# Altium PCB EVB_MBD_AK376xE_V1.0.0.PcbDoc (part 3 of 5)
Units mil, origin at the board's own origin, x right, y up, seen from the top; angles counter-clockwise.
Board outline 7060.01 x 5460.01 mil, 4 copper layers (Top, Layer 1, Layer 2, Bottom), stack 5.512 mil thick; 344 components, 305 nets, 1421 pads, 1325 vias.
Unrouted connection lines stored in the file: 947.
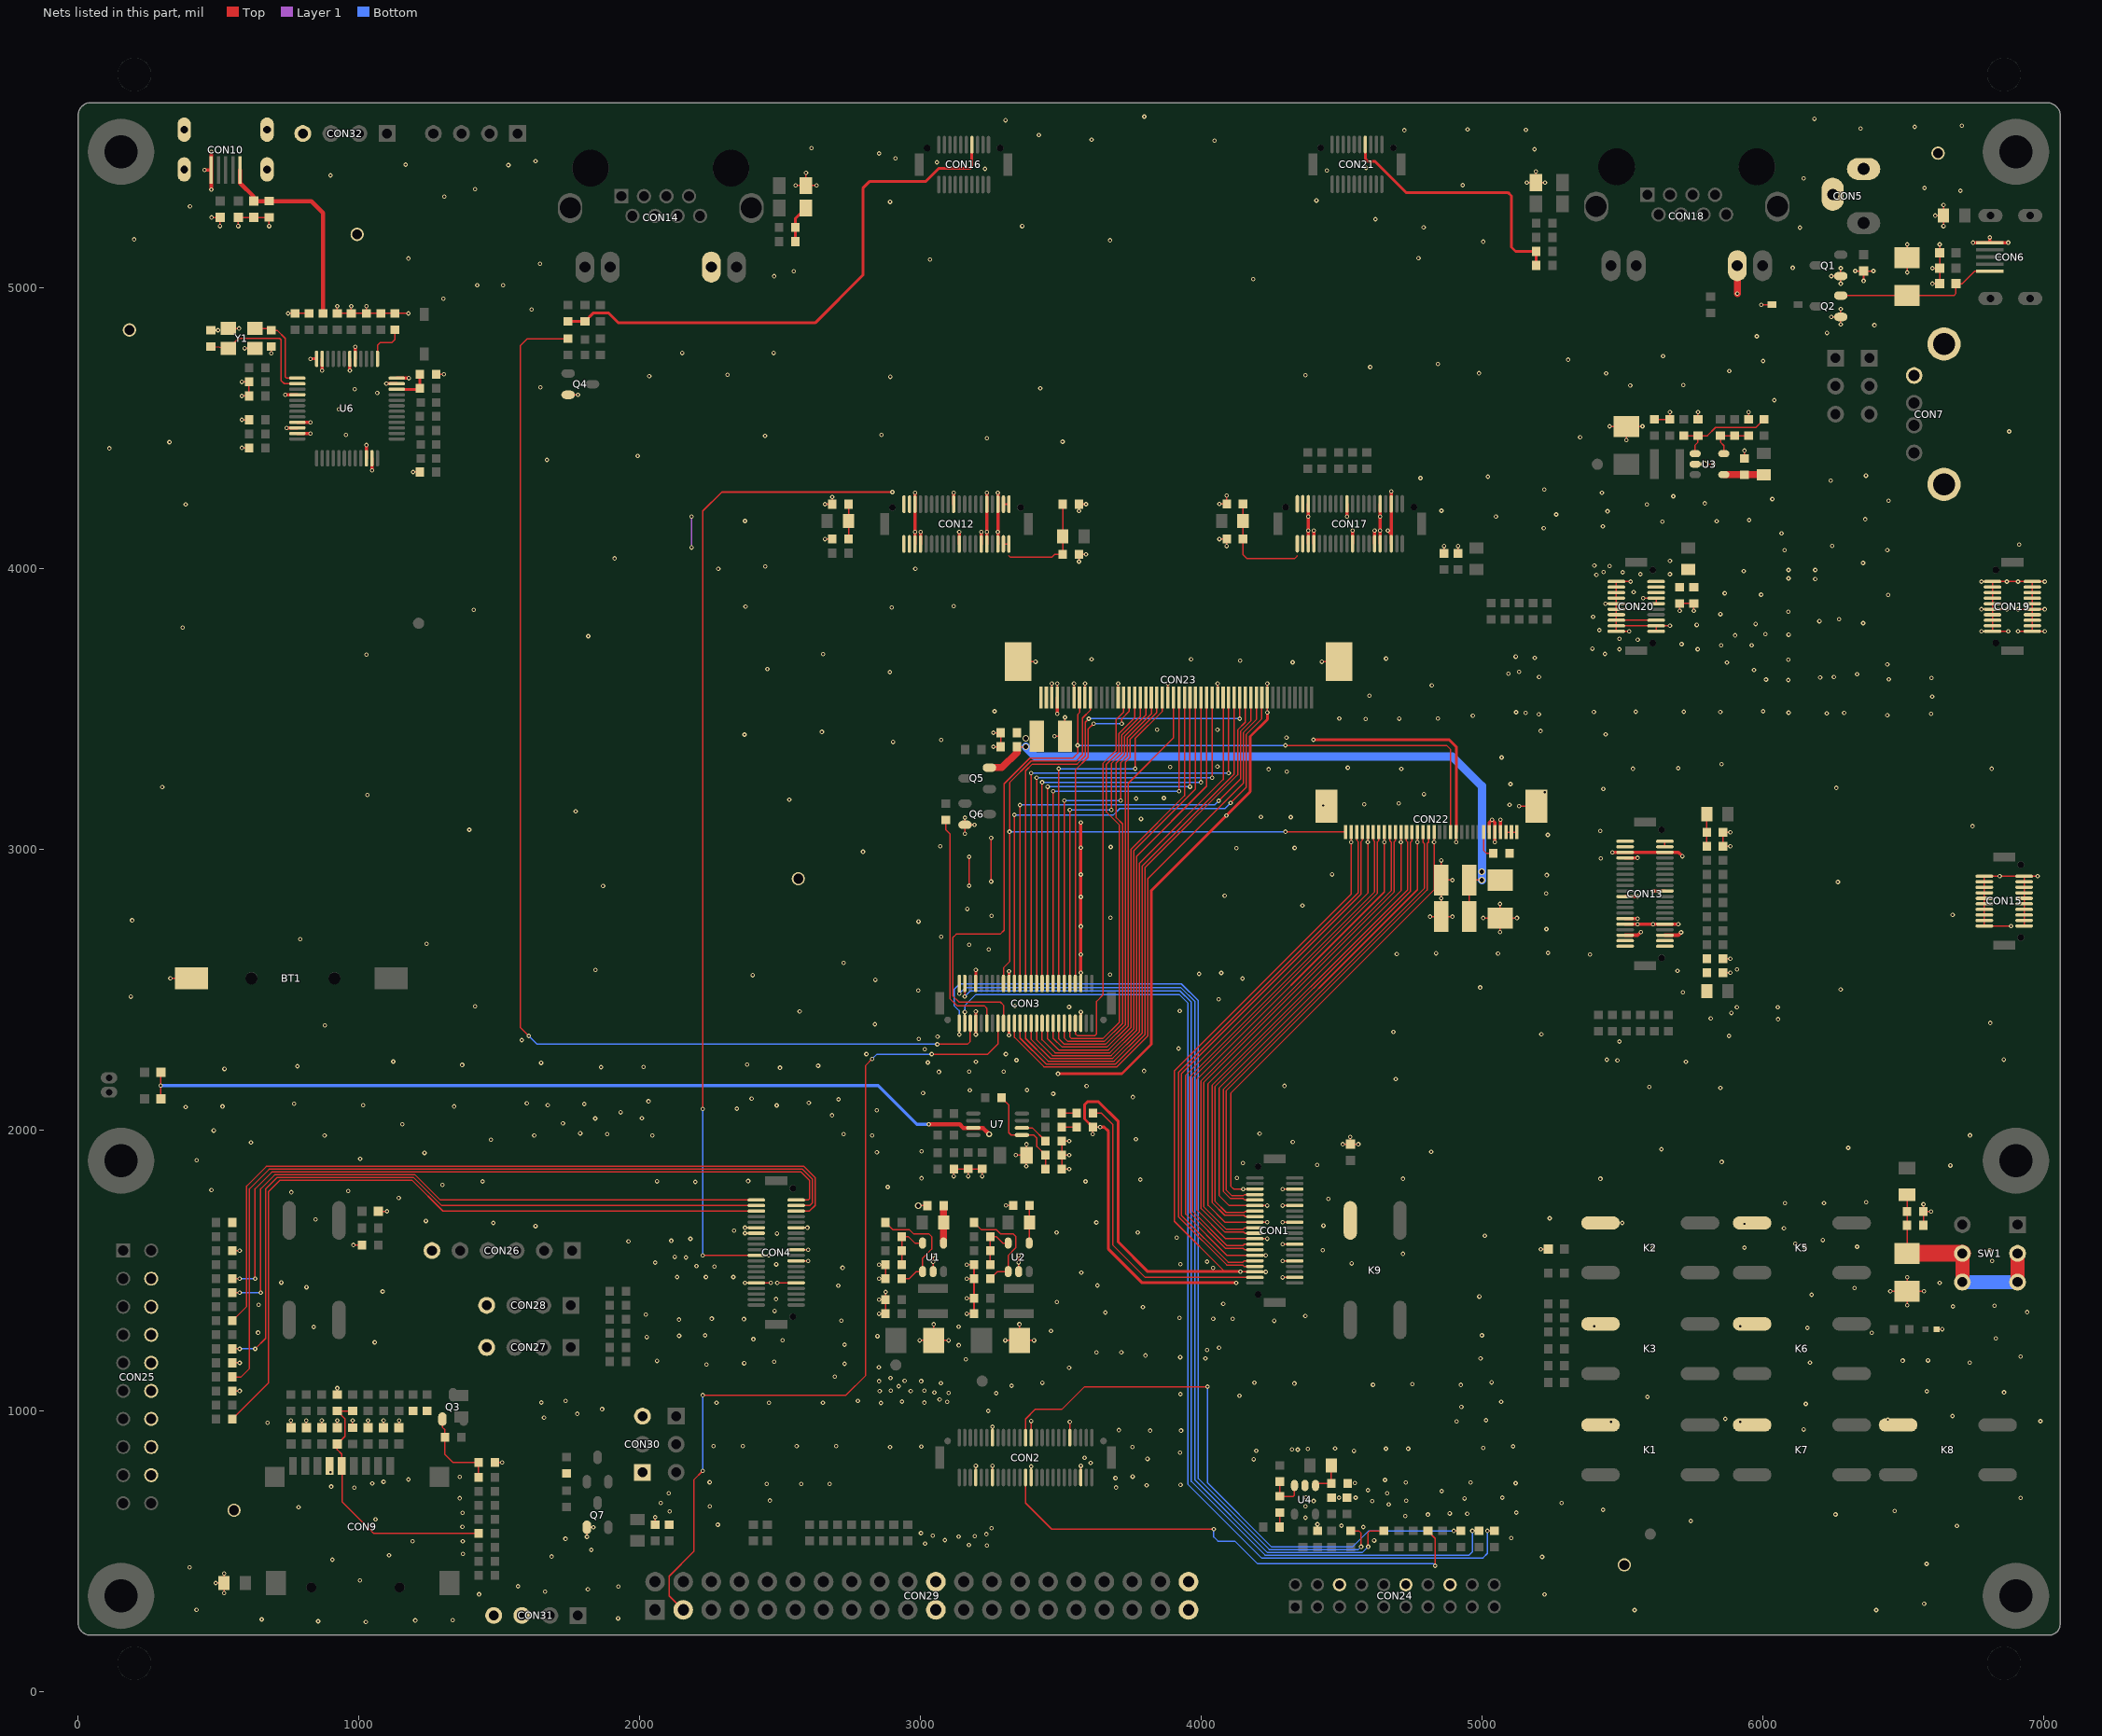
[diagram p5: the nets of this part, all layers, seen from the top]

## Via types
v1: diameter 15.75, hole 7.87, Top to Bottom, 1261 vias
v2: diameter 24, hole 16, Top to Bottom, 43 vias
v3: diameter 20, hole 12, Top to Bottom, 21 vias

## Nets (pads, with @x,y where several pads share a name; then routed paths per layer and width w, separated by ;. In a path a pad name is that pad's centre, name@x,y a point inside that pad or via, vN(x,y) a via of type N, cw(c..) or ccw(c..) an arc to the next point about the centre after c; other vN are vias at no path point) (continued)
GND: BT1.2 C1.1 C2.2 C3.1 C4.2 C5.2 C7.2 C8.1 C9.2 C10.1 C11.2 C13.2 C14.1 C15.2 C16.2 C17.1 C18.2 C20.2 C21.1 C22.2 C23.1 C24.2 C25.1 C26.2 C27.2 C28.2 C34.2 C35.2 C36.1 C37.2 C38.2 C39.2 C40.2 C41.2 C42.2 C43.2 C44.2 C45.2 C46.2 C47.2 C48.2 C49.2 C50.2 C51.2 C52.1 C54.2 C55.2 C56.2 C57.2 C58.2 C59.2 C60.2 C61.2 C62.2 C63.2 C64.2 C65.2 C67.1 C68.2 C69.2 C70.2 C71.2 C72.2 C73.2 C75.1 C76.1 C77.1 C78.2 C79.2 C80.2 C81.2 C82.2 C83.1 C84.2 C85.2 C86.2 C87.2 C88.1 C89.2 CON1.3 CON1.6 CON1.9 CON1.12 CON1.15 CON1.18 CON1.23 CON1.24 CON1.29 CON1.30 CON1.35 CON1.36 CON2.7 CON2.13 CON2.14 CON2.27 CON2.28 CON2.42 CON2.45 CON3.5 CON3.6 CON3.31 CON3.32 CON3.43 CON3.44 CON4.11 CON4.12 CON4.13 CON4.20 CON4.21 CON4.24 CON4.31 CON4.32 CON5.2 CON5.3 CON6.5 CON7.4 CON7.5 CON7.6 CON9.6 CON10.5 CON10.6 CON10.7 CON10.8 CON10.9 CON12.5 CON12.6 CON12.7 CON12.20 CON12.21 CON12.29 CON12.31 CON12.32 CON12.35 CON12.36 CON13.5 CON13.6 CON13.7 CON13.20 CON13.21 CON13.29 CON13.31 CON13.32 CON13.35 CON13.36 CON14.15 CON15.1 CON15.2 CON15.3 CON15.4 CON15.5 CON15.6 CON15.7 CON15.8 CON15.9 CON15.10 CON15.11 CON15.12 CON15.13 CON15.14 CON15.15 CON15.16 CON15.17 CON15.18 CON15.19 CON15.20 CON17.5 CON17.6 CON17.7 CON17.20 CON17.21 CON17.29 CON17.31 CON17.32 CON17.35 CON17.36 CON18.15 CON19.1 CON19.2 CON19.3 CON19.4 CON19.5 CON19.6 CON19.7 CON19.8 CON19.9 CON19.10 CON19.11 CON19.12 CON19.13 CON19.14 CON19.15 CON19.16 CON19.17 CON19.18 CON19.19 CON19.20 CON20.1 CON20.3 CON20.5 CON20.7 CON20.8 CON20.9 CON20.10 CON20.11 CON20.13 CON20.15 CON20.16 CON20.17 CON20.18 CON20.19 CON20.20 CON22.2 CON22.5 CON22.8 CON22.11 CON22.14 CON22.17 CON22.21 CON22.26 CON22.27 CON22.28 CON22.29 CON22.33 CON22.34 CON23.3 CON23.4 CON23.7 CON23.9 CON23.15 CON23.24 CON23.33 CON23.42 CON23.51 CON23.52 CON24.6 CON24.12 CON24.16 CON25.4 CON25.6 CON25.8 CON25.10 CON25.12 CON25.14 CON25.16 CON25.18 CON26.6 CON27.4 CON28.4 CON29.21 CON29.22 CON29.39 CON29.40 CON30.1 CON30.3 CON31.3 CON31.4 CON32.4 D2.1 E1.2 E2.2 E3.2 E4.2 E5.2 E6.2 E7.2 E8.2 E9.2 E10.2 E11.2 E12.2 E13.2 E14.2 E15.2 E16.2 E19.2 E20.2 E25.2 FB3.2 FB8.2 K1.2 K2.2 K3.2 K5.2 K6.2 K7.2 K8.2 K9.1 Q1.G Q2.G Q4.E Q6.E Q7.G R3.1 R4.2 R7.1 R11.1 R31.2 R32.1 R34.1 R106.1 R107.1 R141.1 R142.1 TP1.1 TP2.1 TP4.1 TP5.1 TP6.1 TP7.1 U1.2 U2.2 U3.2 U4.2 U6.4 U6.9 U6.10 U6.11 U6.22 U6.23 U6.35 U6.36 U6.41 U6.42 U6.47 U6.48 U7.7 Y1.2 Y1.4 | length 38509.6
  Top w5: E15.2@294,2110 v1(294,2157.5) E16.2@294,2205 ; v1(328,2540) BT1.2@402.93,2540 ; C54.2@472.5,4849 v1(497.5,4849) ; v1(475,5251) E12.2@505,5251 v1(505,5220) ; v1(490,385.75) FB8.2@519.5,385.75 ; v1(519.5,350) FB8.2@519.5,385.75 ; v1(519.5,420) FB8.2@519.5,385.75 ; Y1.4@535.26,4855.43 v1(572.5,4855.43) ; R106.1@549,1070 v1(575,1070) ; R107.1@549,1170 v1(575,1170) ; C85.2@549,1570 v1(575,1570) ; v1(570,5220) E13.2@570,5251 E14.2@625,5251 C36.1@680,5251 v1(680,5220) ; v1(582.5,4430) C41.2@608.5,4430 ; v1(582.5,4530) C40.2@608.5,4530 ; v1(582.5,4615) R32.1@608.5,4615 C37.2@608.5,4665 v1(582.5,4665) ; v1(592.5,4784.57) Y1.2@629.74,4784.57 ; v1(687.5,4767) C51.2@687.5,4791 ; v1(747.5,4909) C43.2@772.5,4909 C44.2@822.5,4909 ; E11.2@757.5,939 v1(757.5,965) ; E10.2@812.5,939 v1(812.5,965) ; E9.2@867.5,939 v1(867.5,965) ; E8.2@922.5,939 v1(922.5,965) ; C35.2@922.5,1056.5 v1(922.5,1080) ; v1(922.5,4935) C38.2@922.5,4909 C39.2@972.5,4909 ; v1(972.5,4935) C39.2@972.5,4909 ; C28.2@977.5,939 v1(977.5,965) ; v1(980,1590) C86.2@1011,1590 ; v1(1026.4,4935) C42.2@1026.4,4909 ; E7.2@1032.5,939 v1(1032.5,965) ; E20.2@1069,1710 v1(1100,1710) ; E6.2@1087.5,939 v1(1087.5,965) ; E5.2@1142.5,939 v1(1142.5,965) ; v1(1176.5,4909) C46.2@1127.5,4909 C45.2@1077.5,4909 C42.2@1026.4,4909 ; v1(1192.5,4344) R34.1@1217,4344 ; C50.2@1274.5,4692 v1(1302.5,4692) ; C34.2@1484,815 v1(1510,815) ; Q4.E@1745,4619 v1(1780,4619) ; v1(1812,550) Q7.G@1812,584 v1(1835,584) ; C88.1@2055,594 v1(2055,620) ; v1(2225,1553.17) CON4.21@2415.65,1553.17 v1(2460,1553.17) ; v1(2225,2075) 2225,4205 2292.5,4272.5 v1(2900,4272.5) ; v1(2375,1454.74) CON4.31@2415.65,1454.74 v1(2467.5,1454.74) ; v1(2375,1631.91) CON4.13@2415.65,1631.91 ; v1(2375,1651.59) CON4.11@2415.65,1651.59 ; v1(2490,1454.74) CON4.32@2557.39,1454.74 ; v1(2555,5365) C67.1@2592.5,5365 ; CON4.24@2557.39,1533.48 v1(2600,1533.48) ; CON4.20@2557.39,1572.85 v1(2600,1572.85) ; CON4.12@2557.39,1651.59 v1(2597.5,1651.59) ; v1(2592.5,5410) C67.1@2592.5,5365 ; v1(2630,5365) C67.1@2592.5,5365 ; v1(2660,4105) C58.2@2686,4105 ; v1(2660,4229.29) C59.2@2686,4229.29 v1(2686,4255) ; v1(2852.5,1344.72) C3.1@2876,1344.72 C7.2@2876,1395 ; v1(2852.5,1395) C7.2@2876,1395 ; v1(2852.5,1470) C8.1@2876,1470 R3.1@2876,1520 v1(2852.5,1520) ; v1(2876,1422.5) C7.2@2876,1395 ; v2(2992.5,1730) C9.2@3024.4,1730 ; v1(2997.5,1250) C5.2@3047.5,1250 ; U1.2@3045,1495 v1(3045,1530) v1(3045,1552.5) ; v1(3047.5,1307.5) C5.2@3047.5,1250 ; v1(3100,1250) C5.2@3047.5,1250 ; v1(3119,1835) C55.2@3119,1861 C49.2@3170,1861 ; v1(3159,3055) Q6.E@3159,3087 ; v1(3159,3112.5) Q6.E@3159,3087 ; v1(3165,1344.72) C13.2@3191,1344.72 C10.1@3191,1400 ; v1(3165,1400) C10.1@3191,1400 ; v1(3165,1470) C14.1@3191,1470 ; v1(3165,1520) R7.1@3191,1520 C14.1@3191,1470 ; v1(3170,1835) C49.2@3170,1861 ; v1(3173.47,2870) v1(3173.47,2972.87) ; v1(3192.5,3087) Q6.E@3159,3087 ; CON2.7@3197.34,761.63 v1(3197.34,803) ; v1(3220,1835) C56.2@3220,1861 C49.2@3170,1861 ; v1(3252.14,2885) v1(3252.14,3039.94) ; CON2.13@3256.4,761.63 v1(3256.4,803) ; CON2.14@3256.4,903.37 v1(3256.4,942.5) ; v1(3260,3365) C79.2@3286,3365 C77.1@3286,3415 v1(3260,3415) ; v1(3302.5,1250) C11.2@3352.5,1250 ; v1(3305,1731) C15.2@3330,1731 ; v1(3340,1910) C57.2@3377.5,1910 ; CON23.52@3348.14,3667.95 v1(3410,3667.95) ; U2.2@3350,1495 v1(3350,1527.5) v1(3350,1552.5) ; v1(3352.5,1307.5) C11.2@3352.5,1250 ; v1(3377,1870) C57.2@3377.5,1910 ; v1(3378,1949) C57.2@3377.5,1910 ; CON2.27@3394.19,761.63 v1(3394.19,801) ; CON2.28@3394.19,903.37 3394.19,934.86 v1(3394.19,962.5) ; v1(3405,1250) C11.2@3352.5,1250 ; CON23.3@3468.22,3540 v1(3468.22,3590) ; v1(3477.5,3402.5) C76.1@3515,3402.5 v1(3515,3470) ; CON23.4@3487.9,3540 v1(3487.9,3590) ; v1(3530,1860) R31.2@3504,1860 C47.2@3504,1910 ; v1(3530,1910) C47.2@3504,1910 ; v1(3530,1960) C48.2@3504,1960 C47.2@3504,1910 ; CON2.42@3531.99,903.37 v1(3531.99,960) ; CON23.7@3546.96,3540 v1(3546.96,3590) ; v1(3565,4025) C62.2@3565,4051 v1(3590,4051) ; v1(3565,4205) C63.2@3565,4229.29 v1(3590,4229.29) ; CON2.45@3571.36,761.63 v1(3571.36,803) ; CON23.9@3586.33,3540 v1(3586.33,3590) ; v1(3614,1985) C52.1@3614,2010 v1(3640,2010) ; CON23.15@3704.44,3540 v1(3704.44,3590) ; CON23.24@3881.6,3540 v1(3881.6,3590) ; CON23.33@4058.77,3540 v1(4058.77,3590) ; v1(4065,4105) C69.2@4091,4105 v1(4091,4080) ; v1(4065,4230.31) C68.2@4091,4230.31 v1(4091,4260) ; CON1.36@4191.63,1789.39 v1(4150,1789.39) 4115.61,1789.39 4105,1800 4105,2130 4829.84,2854.84 v1(4829.84,3025) CON22.17@4829.84,3060.63 ; v1(4230,1494.11) CON1.6@4191.63,1494.11 4085,1494.11 3905,1674.11 3905,2210 4534.57,2839.57 v1(4534.57,3025) CON22.2@4534.57,3060.63 ; v1(4230,1553.17) CON1.12@4191.63,1553.17 4091.83,1553.17 3945,1700 3945,2195 4593.62,2843.62 v1(4593.62,3025) CON22.5@4593.62,3060.63 ; v1(4235,1612.22) CON1.18@4191.63,1612.22 4087.78,1612.22 3985,1715 3985,2180 4652.68,2847.68 v1(4652.68,3025) CON22.8@4652.68,3060.63 ; v1(4235,1671.28) CON1.24@4191.63,1671.28 4085,1671.28 4025,1731.28 4025,2165 4711.73,2851.73 v1@4711.73,3030 ; v1(4235,1730.33) CON1.30@4191.63,1730.33 4191.3,1730 4100,1730 4065,1765 4065,2150 4770.79,2855.79 v1(4770.79,3025) CON22.14@4770.79,3060.63 ; v1(4235.93,3487.5) CON23.42@4235.93,3540 v1(4235.93,3590) ; C83.1@4280,585 C25.1@4280,636 ; v1(4290,1474.43) CON1.3@4333.37,1474.43 ; v1(4290,1533.48) CON1.9@4333.37,1533.48 ; v1(4290,1592.54) CON1.15@4333.37,1592.54 ; v1(4290,1671.28) CON1.23@4333.37,1671.28 ; v1(4290,1730.33) CON1.29@4333.37,1730.33 ; v1(4290,1789.39) CON1.35@4333.37,1789.39 ; C82.2@4414.41,571.5 v1(4414.41,595) ; v1(4430,3667.95) CON23.51@4491.84,3667.95 ; v1(4505,1949) E25.2@4531.42,1949 ; v1(4531.42,1975) E25.2@4531.42,1949 ; v1(4560,1949) E25.2@4531.42,1949 ; v1(4711.73,3025) v1@4711.73,3030 ; CON22.11@4711.73,3060.63 v1@4711.73,3030 ; v1(4815,2760) C78.2@4855,2760 ; v1(4855,2960) C80.2@4855,2890 ; C73.2@4865,4054 v1(4865,4080) ; v1(4895,2760) C78.2@4855,2760 ; v1(4895,2890) C80.2@4855,2890 ; v1(4908.58,3025) CON22.21@4908.58,3060.63 ; C72.2@4915,4054 v1(4915,4080) ; v1(5005,2755) C87.2@5065,2755 ; CON22.26@5007.01,3060.63 5007.01,2995 5017.01,2985 C81.2@5041,2985 ; v1(5065,2705) C87.2@5065,2755 ; v1(5065,2805) C87.2@5065,2755 ; v1(5125,2755) C87.2@5065,2755 ; v1(5132.5,3153.15) CON22.33@5194.02,3153.15 ; v1(5160,5375) C75.1@5192.5,5375 ; v1(5192.5,5415) C75.1@5192.5,5375 ; v1(5210,1575) E19.2@5236,1575 ; v1(5225,5375) C75.1@5192.5,5375 ; v1(5400,1300) K3.2@5422.83,1308.58 ; v1(5440,3874.84) CON20.9@5479.13,3874.84 ; v1(5455,4506.6) C18.2@5515,4506.6 ; v1(5515,4457.5) C18.2@5515,4506.6 ; v1(5525,3776.42) CON20.19@5479.13,3776.42 CON20.17@5479.13,3796.1 ; v1(5530,3953.58) CON20.1@5479.13,3953.58 CON20.3@5479.13,3933.9 CON20.5@5479.13,3914.21 CON20.7@5479.13,3894.53 CON20.9@5479.13,3874.84 ; v1(5572.5,4506.6) C18.2@5515,4506.6 ; v1(5575,3894.53) CON20.8@5620.87,3894.53 CON20.10@5620.87,3874.84 ; C17.1@5614.72,4531.5 C20.2@5670,4531.5 v1(5670,4557.5) ; CON20.20@5620.87,3776.42 CON20.18@5620.87,3796.1 ; CON20.16@5620.87,3815.79 CON20.15@5479.13,3815.79 ; v1(5670,3796.1) CON20.18@5620.87,3796.1 ; v1(5705,3850) C70.2@5705,3876 C71.2@5755,3876 v1(5755,3850) ; U3.2@5760,4371.9 v2(5792.5,4371.9) v1(5825,4371.9) ; C21.1@5770,4531.5 v1(5770,4557.5) ; C64.2@5859,2560 v1(5885,2560) ; C65.2@5859,2610 v1(5885,2610) ; v1(5885,3010) C60.2@5859,3010 C61.2@5859,3060 v1(5885,3060) ; C22.2@5935,4392.5 v1(5935,4420) ; R11.1@5950,4531.5 v1(5950,4557.5) ; v1(5995,4940) D2.1@6032.76,4940 ; v1(6245,4896.5) Q2.G@6278.5,4896.5 ; v1(6245,5042) Q1.G@6278.5,5042 ; v1(6278.5,4870) Q2.G@6278.5,4896.5 ; v1(6278.5,4925) Q2.G@6278.5,4896.5 ; v1(6278.5,5015) Q1.G@6278.5,5042 ; v1(6278.5,5070) Q1.G@6278.5,5042 ; v1(6330,5060) E1.2@6360,5060 ; v1(6360,5025) E1.2@6360,5060 ; v1(6395,5060) E1.2@6360,5060 ; v1(6455,1425) C2.2@6515,1425 ; v1(6515,1375) C2.2@6515,1425 ; v1(6515,1475) C2.2@6515,1425 ; v1(6515,5055) C16.2@6515,5107.5 v1(6515,5155) ; C1.1@6573,1660 C4.2@6573,1709 ; v1(6573,1735) C4.2@6573,1709 ; v1(6575,1425) C2.2@6515,1425 ; v1(6600,1709) C4.2@6573,1709 ; v1(6605,5015) E2.2@6631,5015 E3.2@6631,5070 ; v1(6605,5070) E3.2@6631,5070 ; v1(6615,5257.64) FB3.2@6644.5,5257.64 ; R4.2@6620,1290 v1(6640,1290) ; v1(6631,5155) E4.2@6631,5125 E3.2@6631,5070 ; v1(6644.5,5220) FB3.2@6644.5,5257.64 ; v1(6644.5,5295) FB3.2@6644.5,5257.64 ; v1(6780,3776.42) CON19.2@6819.13,3776.42 ; v1(6780,3855.16) CON19.10@6819.13,3855.16 ; v1(6780,3953.58) CON19.20@6819.13,3953.58 ; v1(6845,2903.74) CON15.2@6931.74,2903.74 CON15.4@6931.74,2884.06 CON15.6@6931.74,2864.37 CON15.8@6931.74,2844.69 CON15.10@6931.74,2825 CON15.12@6931.74,2805.32 CON15.14@6931.74,2785.63 CON15.16@6931.74,2765.95 CON15.18@6931.74,2746.26 CON15.20@6931.74,2726.58 ; v1(6870,3855.16) CON19.10@6819.13,3855.16 ; v1(6875,3776.42) CON19.2@6819.13,3776.42 ; v1(6885,2726.57) CON15.19@6790,2726.58 CON15.17@6790,2746.26 CON15.15@6790,2765.95 CON15.13@6790,2785.63 CON15.11@6790,2805.32 CON15.9@6790,2825 CON15.7@6790,2844.69 CON15.5@6790,2864.37 CON15.3@6790,2884.06 CON15.1@6790,2903.74 v1(6980,2903.74) ; v1(6910,3776.42) CON19.1@6960.87,3776.42 ; v1(6910,3855.16) CON19.9@6960.87,3855.16 ; v1(7005,3776.42) CON19.1@6960.87,3776.42 ; v1(7005,3855.16) CON19.9@6960.87,3855.16 ; v1(7005,3953.58) CON19.19@6960.87,3953.58 ; C39.2@972.5,4909 C42.2@1026.4,4909 ; C10.1@3191,1400 C14.1@3191,1470 ; C78.2@4855,2760 v1(4855,2825) C80.2@4855,2890 ; CON20.17@5479.13,3796.1 CON20.15@5479.13,3815.79 ; CON20.17@5479.13,3796.1 CON20.18@5620.87,3796.1 ; CON20.15@5479.13,3815.79 CON20.13@5479.13,3835.47 CON20.11@5479.13,3855.16 CON20.9@5479.13,3874.84 ; CON19.2@6819.13,3776.42 CON19.4@6819.13,3796.1 CON19.6@6819.13,3815.79 CON19.8@6819.13,3835.47 CON19.10@6819.13,3855.16 ; CON19.10@6819.13,3855.16 CON19.12@6819.13,3874.84 CON19.14@6819.13,3894.53 CON19.16@6819.13,3914.21 CON19.18@6819.13,3933.9 CON19.20@6819.13,3953.58 ; CON19.20@6819.13,3953.58 v1(6870,3953.58) v1(6910,3953.58) CON19.19@6960.87,3953.58 ; CON19.1@6960.87,3776.42 CON19.3@6960.87,3796.1 CON19.5@6960.87,3815.79 CON19.7@6960.87,3835.47 CON19.9@6960.87,3855.16 ; CON19.9@6960.87,3855.16 CON19.11@6960.87,3874.84 CON19.13@6960.87,3894.53 CON19.15@6960.87,3914.21 CON19.17@6960.87,3933.9 CON19.19@6960.87,3953.58
  Top w10: v1(827.5,4747.17) U6.48@849.23,4747.17 ; v1(3197.34,2340) CON3.44@3197.34,2380.14 v1(3197.34,2422.5) ; CON3.43@3197.34,2521.87 v1(3197.34,2570) ; v1(3315.45,2337.5) CON3.32@3315.45,2380.14 ; CON3.31@3315.45,2521.87 v1(3315.45,2565) ; v1(3490,2200) 3717.5,2200 3822.5,2305 3822.5,2852.5 v1(4090,3120) 4175,3205 4175,3401.57 4235.93,3462.5 v1(4235.93,3487.5) ; CON3.6@3571.36,2380.14 v1(3571.36,2420) ; CON3.5@3571.36,2521.87 v1(3571.36,2560) ; C52.1@3614,2010 3585,2039 3585,2090 3595,2100 3635,2100 3705,2030 3705,1600 3810,1495 v1(4140,1495) ; v1(3640,2010) 3655,2010 3670,1995 3670,1575 3790,1455 v1(4125,1455) ; v1(4400,3390) 4883.58,3390 4908.58,3365 CON22.21@4908.58,3060.63
  Top w12: v1(450,5419.84) CON10.5@473.82,5419.84 ; v1(473.82,5350) CON10.5@473.82,5419.84 ; v1(473.82,5485) CON10.5@473.82,5419.84 ; v1(737.5,4619.21) U6.4@780.33,4619.21 ; v1(742.5,4501.1) U6.10@780.33,4501.1 ; U6.11@780.33,4481.42 v1(827.5,4481.42) ; U6.9@780.33,4520.79 v1(827.5,4520.79) ; v1(868.92,4705) U6.47@868.92,4747.17 ; v1(967.34,4705) U6.42@967.34,4747.17 ; U6.41@987.03,4747.17 v1(987.03,4790) ; U6.22@1026.4,4392.83 v1(1026.4,4440) ; v1(1046.08,4350) U6.23@1046.08,4392.83 ; v1(1097.5,4658.58) U6.35@1134.67,4658.58 ; U6.36@1134.67,4678.27 v1(1177.5,4678.27) ; CON12.5@2980.67,4087.55 v1(2980.67,4270) ; v1(2980.67,4130) CON12.6@2980.67,4229.29 ; CON12.7@3000.36,4087.55 v1(3000.35,4130) ; CON12.20@3118.47,4229.29 v1(3118.46,4270) ; CON12.21@3138.15,4087.55 v1(3138.15,4130) ; CON12.29@3216.89,4087.55 v1(3216.89,4130) ; v1(3236.57,4130) CON12.32@3236.58,4229.29 ; v1(3236.57,4270) CON12.31@3236.58,4087.55 ; CON12.35@3275.95,4087.55 v1(3275.94,4270) ; v1(3275.94,4130) CON12.36@3275.95,4229.29 ; v1(3487.9,3482.5) CON23.4@3487.9,3540 ; v1(3571.36,2560) v1(3571.36,2625) v1(3571.36,2725) v1(3571.36,2830) v1(3571.36,2910) v1(3571.36,3005) v1(3571.36,3095) ; CON17.5@4381.93,4088.58 v1(4381.93,4185) ; v1(4381.93,4135) CON17.6@4381.93,4230.32 ; CON17.7@4401.62,4088.58 v1(4401.61,4135) ; v1(4519.72,4185) CON17.20@4519.73,4230.32 ; CON17.21@4539.41,4088.58 v1(4539.41,4135) ; CON17.29@4618.15,4088.58 v1(4618.15,4135) ; CON17.31@4637.84,4088.58 v1(4637.83,4185) ; v1(4637.83,4135) CON17.32@4637.84,4230.32 ; v1(4665,4135) 4677.2,4122.8 CON17.36@4677.21,4230.32 ; CON17.35@4677.21,4088.58 v1(4677.2,4275) ; CON22.27@5026.69,3060.63 5026.69,3095 v1(5036.69,3105) 5046.38,3095.31 CON22.28@5046.38,3060.63 v1(5046.38,3025) ; CON22.29@5066.06,3060.63 v1(5066.06,3105) ; v1(5465,2988.98) CON13.6@5652,2988.98 ; CON13.35@5510.26,2693.7 5555,2693.71 v1(5566.29,2705) ; CON13.29@5510.26,2752.76 v1(5555,2752.76) ; CON13.21@5510.26,2831.5 v1(5555,2831.5) ; CON13.7@5510.26,2969.29 v1(5555,2969.3) ; CON13.5@5510.26,2988.98 5700,2988.98 v1(5713.98,2975) ; v1(5555,2733.08) CON13.32@5652,2733.07 ; v1(5610,2733.08) CON13.31@5510.26,2733.07 v1(5700,2733.08) ; v1(5610,2851.19) CON13.20@5652,2851.18 ; CON13.36@5652,2693.7 5700,2693.7 v1(5710,2703.71) ; v1(6750,5161.18) CON6.5@6809.84,5161.18 ; v1(6809.84,5180) CON6.5@6809.84,5161.18 ; v1(6875,5161.18) CON6.5@6809.84,5161.18
  Top w15: v1(3030,2020) 3140,2020 3152.8,2007.2 U7.7@3188.39,2007.2 3222.8,2007.2 v3(3245,1985)
  Top w25: v1(5909.92,4980) CON18.15@5909.92,5079.19
  Layer 1 w5: v1(2185,4075) v1(2185,4185)
  Bottom w5: v1(2225,1553.17) v1(2225,2075)
  Bottom w12: v1(294,2157.5) 2850,2157.5 2987.5,2020 v1(3030,2020)
  other v1: 1024.36,246.93 854.72,249.32 1200.58,252.31 1333.79,253.5 653.41,255.89 1923.05,259.54 5544.26,289.35 6404.99,289.35 421.17,289.66 6575.76,311.77 1427.74,345.36 5223.43,344.54 1663.34,354.9 1815.35,362.75 1924.18,372.85 1566.3,373.97 1003.32,395.15 396.48,440.89 6584.26,453.86 904.98,468.9 5214.66,478.51 1686.21,480.05 1107.18,484.83 1370.88,489.27 1827.69,503.55 3236.35,519.71 3172.6,521.07 3016.41,526.08 1191.13,534.21 1369.89,534.21 4616.44,537.2 3087.45,538.38 1735.58,543.09 5104.91,546.02 3136.17,550.67 3193.09,552.95 3044.19,554.31 3235.44,559.78 3001.84,563.42 3253.58,580.48 4577.5,585 1368.41,585.57 6692.18,589.23 4500,590 2278.33,593.26 5744.35,606.73 1058.79,612.73 4371.53,618.45 4727.38,624.38 4807.75,629.49 6260,630 4885.65,633.43 4947.83,632.54 1368.9,635.44 5122.5,636.58 2107.09,640.83 6470.69,642.11 5432.14,646.4 784.64,655.88 2249.62,659.29 4371.9,658.82 4668.5,665.48 2075,671 5283.8,670.55 4609.63,677.33 4400.71,677.73 2463.97,679.38 4730.34,679.18 4938.29,686.78 1358.53,687.79 6919.39,689.26 4373.1,690.4 4491.66,689.83 4550.46,689.64 5073.36,689.52 2103.51,705.43 4662.21,705.1 4857.35,713.17 4594.57,716.11 983.73,725.81 3697.38,726.02 901.26,729.27 3806.03,733.49 3926.85,735.52 2452.3,738.39 2575.27,738.57 2676.33,739.03 1047.43,740.62 5120.14,741.23 4548.19,742.4 2249.11,744.4 4728.86,743.98 4959.62,743.59 1087.43,746.06 4654.98,753.06 1176.31,754.45 3694.76,759.42 1359.02,763.83 3756,764.81 898.5,780 3606.34,813.79 4186.92,826.21 3808.88,827.87 3584.72,832.13 3924.41,849.83 4544.94,856.11 4196.36,856.9 4344.29,860.83 4323.83,861.62 4379.7,863.19 4658.25,863.98 4737.72,863.98 4477.27,864.77 5004.47,866.34 2891.92,870.15 3755.18,869.77 3003.25,871.33 5111.31,872.36 2263.06,873.7 2367.28,873.7 2559.14,873.7 2700.07,873.7 3818.64,928.75 3928.48,928.75 3707.18,930.38 6146.58,932.63 674.32,956.36 5460,960 5920,960 4909.94,961.68 6990.02,962.13 5014.82,965.49 6446.58,967.05 5867.46,970.75 1659.07,974.37 6676.49,980.58 1777.5,988.58 3241.44,998.92 1866.32,1005.16 4927.28,1012.85 6153.95,1023.61 2859.59,1026.99 2273.72,1027.66 2460.84,1027.66 2652.7,1027.66 3014.31,1028.45 1649.6,1028.85 5068.95,1031.04 2934.64,1031.99 3095.52,1031.51 1736.05,1034.77 2777.05,1034.77 3068.38,1039.5 5589.93,1048.56 4136.74,1053.02 3926.15,1058.69 3270.19,1062.02 3100.32,1062.51 3049.68,1064.47 6860,1065 2965.35,1069.11 6585,1068.58 2855.04,1069.74 2894.29,1071.48 3013.88,1071.07 2922.36,1087.02 3324.5,1088.37 4612.07,1091.67 4925.16,1091.51 4752.2,1094.05 4332.4,1096.6 3073.12,1097.53 3434.72,1098.76 4189.65,1099.3 5034.7,1100.4 2852.77,1104.76 3002.86,1104.76 2943.73,1106.12 2893.7,1115.68 2695.33,1121.22 3529.76,1152.27 2851.86,1154.34 2238.19,1163.85 2730.16,1166.84 2372.02,1168.59 6168.71,1171.15 6737.97,1171.15 2478.6,1174.51 2061.73,1176.88 6499.27,1177.97 6589.2,1178.53 3162.34,1182.53 4015.4,1185.56 4995.33,1186.05 3925.71,1190.2 6919.39,1192.26 3801.3,1196.19 3627.19,1207.37 3715.85,1207.37 4021.1,1215.92 4063.8,1223.78 3136.53,1232.73 2729.54,1234.76 1055.9,1242.87 2508.54,1250.45 2405.07,1254.46 6831.41,1257.22 2025.69,1261.68 2846.85,1265.02 2140.39,1266.49 2232.63,1268.1 5000.28,1267.87 6388.79,1276.89 640.42,1277.65 3465.35,1283.39 6160.05,1294.58 838.77,1298.12 3136.17,1298.49 5920,1300 2717.83,1320.18 4260.57,1319.91 2139.59,1324.24 2371.39,1325.85 2256.69,1327.45 4043.13,1327.11 4112.64,1326.69 3923.17,1330.08 4371.21,1337.28 2021.68,1341.89 3658.91,1349.29 6942.25,1350.87 2480.47,1354.72 3792.35,1368.23 6677.89,1370.88 6826.51,1373.74 642.51,1376.92 4078.73,1380.1 3485.94,1387.18 2485.28,1397.23 4990.94,1406.27 6174.41,1412.62 1084.16,1424.03 6327.31,1436.72 813.07,1439.44 2707.46,1445.36 3630.91,1445.66 6630.74,1455.19 723.14,1456.15 2133.17,1475.83 2235.84,1475.83 2333.69,1475.83 3573.25,1491.79 4042.76,1508.26 2722.7,1508.72 2266.51,1512.86 2202.32,1514.39 2486.2,1520.88 3926.62,1521.44 4536.63,1524.2 2055.37,1527.17 4021.34,1530.5 6818.11,1533.22 2165.25,1545.61 2125,1547.5 4719.22,1558.55 2489.29,1564.86 4433.59,1571.2 6808.74,1571.62 5608.63,1578.43 5935.83,1580.24 6150.96,1582.05 6336.64,1583.8 6116.61,1594.7 1959.89,1602.62 2112.5,1605 6214.9,1607.25 2180.49,1612.19 3912.61,1616.17 5010.49,1622.76 2489.29,1630.63 3485.11,1634.29 3774.43,1634.2 2336.3,1640.73 6076.13,1649.44 1628.76,1657.24 4435.62,1658.81 5935,1665 1478.56,1668.62 5500,1668.58 3626.73,1670.27 1238.47,1675.44 845.19,1680.98 5241.66,1685.09 6079.61,1739.49 6218.81,1739.05 6368.89,1742.53 4453.48,1753.78 1141.75,1757.37 759.42,1777.85 961.96,1782.41 474.35,1785.34 2883.4,1796.58 1297.23,1803.94 2198.29,1814.89 1440.41,1816.43 3588.08,1816.26 2061.66,1816.72 2386.31,1817.78 3783.02,1823.13 4719.22,1826.09 5422.43,1826.09 3003.92,1827.69 4127.5,1828.42 6669.17,1873.24 4412.9,1875.61 4149.28,1882.3 5854.49,1885.95 421.24,1891.57 1003.95,1896.71 1233.61,1917.99 2845,1920 4819.35,1921.67 3004.41,1923.43 5639.36,1930.94 6305.13,1936.02 615.44,1955.27 4326.3,1956.68 1470.15,1965.15 3767.56,1966.54 877.57,1980.04 1624.32,1980.39 2045.39,1980.5 2827.5,1980 6739.09,1980.53 1884.08,1985.1 2726.42,1984.66 4208.38,1986.77 1788.09,1987.84 482.68,1997.79 1154.29,2020.17 1726.58,2023.49 1841.77,2040.73 2007.88,2041.91 2684.98,2052.13 1932.27,2062.67 2844.14,2070.02 2345.56,2075.44 382.58,2081.29 513.76,2083.67 1339.01,2083.67 2488.15,2087.45 1014.64,2088.44 1672.51,2087.75 1802.45,2092.19 768.97,2093.21 1597.68,2094.41 2602.46,2096.38 2031.43,2101.97 2708.57,2108.95 2398.62,2111.74 3757.26,2116.83 3473.14,2128.87 3009.48,2131.08 3175.86,2141.07 3379.96,2142.18 5850,2150 5596.17,2152.97 3591.82,2156.6 4296.71,2156.68 4693.03,2181.19 3066.05,2206.51 3173.64,2207.62 3296.77,2207.62 3797.03,2209.84 520.92,2217.24 2499.84,2221.55 1862.49,2223.43 2013.54,2224.13 780.89,2226.78 2635.59,2228.43 1367.63,2231.55 2382.13,2232.72 1648.88,2238.79 3026.35,2240.03 1121.97,2243.47 3197.45,2242.6 5727,2243 5482.87,2247.73 3342.25,2248.66 5444.88,2249.96 6859.07,2250.44 2807.5,2270 3304.22,2270.05 3015.47,2287.75 3919.27,2289.79 5490,2315 1580,2320 2994.45,2323.81 3061.12,2332.15 5881,2335 5212,2341 4684.86,2348.71 878.68,2372.27 2837.91,2376.19 6811.41,2381.1 6055.01,2394.32 5815.23,2396.79 5888.57,2416.57 2569.74,2422.36 3923.72,2423.35 5908.34,2437.17 6054.19,2437.17 3529.71,2437.82 1413.49,2440.06 3336.05,2441.16 4062.85,2465.65 187,2474.83 5716.32,2489.88 2992.67,2497.03 6278.28,2499.88 4994.22,2507.29 2839.69,2534.53 4147.44,2539.11 2402.78,2551.15 3675.52,2553.58 3992.73,2555.8 4071.75,2559.14 5696.97,2566.7 1842.27,2570.24 5908.67,2571.39 2726.74,2594.91 5385.49,2624.76 4696.79,2626.44 5057.41,2627.85 4836.8,2629.26 5235.5,2630.58 3243.11,2642.71 3173.47,2659.48 1241.22,2663.26 790.44,2679.95 3074.17,2687.85 5230.01,2715.27 2993.26,2742.27 191.77,2746.73 3676.63,2756.15 3253.43,2762.65 6677.04,2766.29 3167.02,2787.16 4360.76,2799.37 4083.64,2834.01 5229.36,2842.63 1869.65,2868.72 6268.29,2883.46 5231.3,2907.79 4466.41,2910.22 5423.95,2967.23 2795.59,2990.93 4125.81,3003.67 4332.94,3004.38 3677.75,3007.69 3070.3,3010.27 5235.01,3051.09 5421.83,3065.42 1392.86,3069.16 6747.89,3082.38 3785.71,3107.86 4319.55,3114.29 4213.04,3115.08 1771.72,3134.8 4434.67,3155.91 5098.58,3157.9 4580.72,3159.63 4703.69,3163.09 2533.04,3176.75 3768.47,3180.74 3867.41,3182.33 1030.28,3193.43 4793.75,3196 5224.5,3203 5432.91,3214.55 6262.84,3218.63 299.18,3221.02 5102.05,3232.37 4305.05,3276.63 4240.07,3285.1 4713.39,3286.19 5538,3286.76 6816.01,3286.76 5699.85,3288.55 4522.46,3290.42 3890.07,3293.19 4058.15,3294.78 5854.09,3303.11 5070.67,3327.15 2902.88,3382.02 3074.17,3389.21 4304.11,3397.17 2373.46,3408.37 5440.84,3409.47 2648.95,3417.96 5208.91,3421.36 3843.57,3425.52 4058.15,3425.92 4585.83,3464.34 4705.45,3465.22 4844,3465.44 4492.01,3465.87 4967.83,3475.4 6444.39,3477.58 5203.1,3480.73 6599.97,3482.46 6228.69,3484.08 6290.44,3485.3 5156.34,3485.65 6092.78,3486.3 5121.89,3488.11 5399.1,3489.25 5849.51,3489.25 5548.01,3489.99 5719.03,3489.99 3264.02,3491.33 6002.11,3491.46 6604.43,3543.79 4599.38,3547.37 4821.46,3583.97 6092.04,3602.78 6012.43,3604.25 6449.67,3605.13 6602,3610.41 6205.13,3612.04 5203.71,3613.61 6253.88,3613.66 6336.74,3623.41 5094.21,3625.3 2890.91,3631.17 5132.97,3632.07 5969.41,3638.51 2454.88,3641.81 6444.43,3658.41 5873.1,3665.44 4326.13,3666.11 4138.87,3671.87 6092.04,3675.02 3609.73,3676.68 3964.09,3676.68 4658.66,3679.22 5188.33,3681.9 5120.66,3686.21 1026.83,3693.47 2653.74,3694.65 5438.91,3696.04 5489.95,3712.57 5768.7,3712.57 5393.81,3714.53 5851.96,3726.23 5961.23,3726.23 5711.66,3730.69 5555.38,3746.17 5490,3750 1816.55,3758.99 5902.59,3762.01 6092.78,3764.22 6010.22,3766.43 5419,3780.82 371.6,3790.03 5765.47,3799.25 5975,3802.5 6358.48,3805.38 6202.5,3812.5 6272.5,3820 5396.28,3827.79 5850,3837.5 6091.21,3846.6 1408.33,3852.96 2898.09,3861.14 2377.05,3864.74 3118.49,3865.94 5548.01,3867.81 6447.41,3905.94 5994.72,3906.85 5865.06,3911.79 5540.64,3915.72 6187.5,3962.5 6092.5,3965 5408.18,3977.95 5565,3980 5670,3980 5433.17,3987.24 5501.81,3986.83 5932.71,3991.15 6092.5,3995 6187.5,3995 2280.03,3998.89 2981.94,3998.89 2447.72,4007.28 5454.96,4009.23 5400.78,4010.74 6358.03,4020.1 5670,4027.5 1910.29,4036.29 6444.43,4065.49 6078.07,4065.85 6247.6,4080.4 6914.11,4085.17 6067.5,4125 5220.42,4143.56 5431,4150.14 5642.77,4166.68 2375.22,4169.37 5836.68,4168.7 5951.81,4172.74 6365.4,4175.83 5050.14,4185.51 5265.05,4192.94 5447.85,4204.05 4856.03,4206.07 5588.23,4228.28 382.55,4228.65 5794.26,4232.32 6448.9,4241.44 6034.63,4247.47 5682.16,4257.57 5427.71,4270.24 5222.63,4281.81 6243.13,4313.01 4781.29,4322.21 5021.66,4327.26 6368.38,4330.91 1669.27,4387.3 1992.79,4401.05 110.57,4428.42 324.79,4450.09 3506.35,4452.16 3236.88,4464.02 5349.89,4467.64 2446.57,4472.7 953.81,4475.88 2861.47,4476.3 6878.68,4488.47 928.35,4567.74 6042.06,4599.77 1065.23,4625.88 984.67,4639.14 3427.04,4641.83 1646.53,4645.6 5528.83,4652.02 5717.84,4653.56 2892.51,4683.21 2034.04,4685.48 4371.57,4688.63 2313.15,4690.11 5442.75,4695.48 4990.28,4695.95 5881.19,4703.91 4602.21,4717.92 4843.84,4728.9 6002.11,4739.61 5307.56,4744.22 5645.62,4756.51 2151.29,4767.98 2476.97,4767.98 5979.56,4827.57 6229.53,4839.49 6398.55,4867.14 1614.88,4923.29 1300.76,4961.31 1421.31,5009.68 1513.17,5009.68 4185.72,5031.52 2479.14,5041.55 2548.62,5058.92 6107.34,5071.52 1644.63,5085.7 3033.9,5100.49 1175.83,5104.7 4774.28,5105.99 5004.93,5164.57 3675.33,5169.46 198.62,5172.81 6133.6,5214.85 4792.59,5215.82 3362.47,5220.01 4621.37,5244.84 397.8,5290.23 2891.85,5306.39 4410.91,5311.4 1304.11,5324.85 6704.71,5346.14 1413.4,5351.78 6576.71,5355.99 4931.71,5365.92 6146.73,5389.9 898.66,5400.87 4447.79,5418.42 3230.22,5423.96 4588.09,5427.42 1532.18,5437.3 1166.32,5438.89 3059.28,5447.53 1628.79,5451.56 2910.72,5461.28 2853.13,5479.15 5187.98,5494.06 2611.86,5498.01 4047.78,5524.66 3609.81,5528.11 3422.04,5544.68 4723.77,5561.78 5156.8,5562.68 4949.34,5564.49 6349.14,5568.24 6541.69,5573.71 6710.18,5578.09 3302.9,5597.3 6185.02,5602.16 3797.34,5610.21
HPOUT: C53.1 CON1.4 | length 1072.1
  Top w5: C53.1@3614,2060 3645,2060 3685,2020 3685,1590 3800.57,1474.43 CON1.4@4191.63,1474.43
I2S0_DOUT: CON2.26 R103.2 | length 2124.9
  Top w5: CON2.26@3374.51,903.37 3374.51,970 3409.51,1005 3505,1005 3585,1085 v1(4022.5,1085) ; v1(4900,571.5) R103.2@4925,571.5
  Bottom w5: v1(4022.5,1085) 4022.5,742.5 4250,515 4540,515 4596.5,571.5 v1(4900,571.5)
I2S0_MCLK: CON2.25 R99.1 | length 1794.5
  Top w5: CON2.25@3374.51,761.63 3374.51,670.49 3467.5,577.5 v1(4045,577.5) ; R99.1@4808.11,571.5 4808.11,570.5 4834,544.61 v1(4834,447)
  Bottom w5: v1(4045,577.5) 4045,550 4060,535 4120,535 4200,455 4826,455 v1(4834,447)
I2S_I2C_SCL: CON3.50 R92.2 | length 3591.4
  Top w5: v1(3138.29,2340) CON3.50@3138.29,2380.14 ; R92.2@4532.5,571.5 4561.94,571.5 4570,563.44 v1(4570,515)
  Bottom w5: v1(3138.29,2340) 3138.29,2425 3120,2443.29 3120,2500 3140,2520 3930,2520 3990,2460 3990,757.5 4242.5,505 4560,505 v1(4570,515)
I2S_I2C_SDA: CON3.49 R94.1 | length 3451.9
  Top w5: v1(3138.29,2485) CON3.49@3138.29,2521.87 ; v1(4595,515) 4595,565 4601.5,571.5 R94.1@4650.63,571.5
  Bottom w5: v1(3138.29,2485) 3160.79,2507.5 3927.5,2507.5 3977.5,2457.5 3977.5,752.5 4235,495 4575,495 v1(4595,515)
I2S_IRQ: CON3.48 R105.1 | length 3888.8
  Top w5: CON3.48@3157.97,2380.14 v1(3158,2420) ; v1(5020,571.5) R105.1@5044.33,571.5
  Bottom w5: v1(3158,2420) 3158,2443 3197.5,2482.5 3922.5,2482.5 3952.5,2452.5 3952.5,737.5 4215,475 5004,475 5020,491 v1(5020,571.5)
I2S_RST: CON3.47 R104.2 | length 3800
  Top w5: v1(3157.97,2475) CON3.47@3157.97,2521.87 ; v1(4966,571.5) R104.2@4990,571.5
  Bottom w5: v1(3157.97,2475) 3177.97,2495 3925,2495 3965,2455 3965,747.5 4227.5,485 4955,485 4966,496 v1(4966,571.5)
JTAG_RCLK: CON4.4 R100.2 | length 2908.5
  Top w5: R100.2@549,1120 580,1120 610,1150 610,1790 680,1860 2580,1860 2615,1825 2615,1740 2605.33,1730.33 CON4.4@2557.39,1730.33
JTAG_RSTN: CON4.2 R91.2 | length 2528
  Top w5: R91.2@549,1470 v1(575,1470) ; v1(630,1470) 630,1790 690,1850 2575,1850 2605,1820 2605,1755 2600.02,1750.02 CON4.2@2557.39,1750.02
  Bottom w5: v1(575,1470) v1(630,1470)
JTAG_TCLK: CON4.3 R97.2 | length 2472.5
  Top w5: R97.2@549,1220 v1(575,1220) ; v1(630,1220) 667.5,1257.5 667.5,1790 707.5,1830 1195,1830 1294.67,1730.33 CON4.3@2415.65,1730.33
  Bottom w5: v1(575,1220) v1(630,1220)
JTAG_TDI: CON4.1 R93.2 | length 2294.6
  Top w5: R93.2@549,1420 v1(575,1420) ; v1(650,1420) 650,1790 700,1840 1200,1840 1289.98,1750.02 2380.02,1750.02 CON4.1@2415.65,1750.02
  Bottom w5: v1(575,1420) v1(650,1420)
JTAG_TDO: CON4.5 R102.2 | length 2663.2
  Top w5: R102.2@549,970 677.5,1098.5 677.5,1780 717.5,1820 1190,1820 1299.35,1710.65 CON4.5@2415.65,1710.65
JTAG_TMS: CON4.6 R95.2 | length 2746.7
  Top w5: R95.2@549,1320 600,1371 600,1800 670,1870 2585,1870 2625,1830 2625,1731 2604.65,1710.65 CON4.6@2557.39,1710.65
LCD_BL: CON3.34 CON22.20 CON23.8 | length 3319.5
  Top w5: CON3.34@3295.77,2380.14 3295.77,2444.23 3285,2455 3137.5,2455 3115,2477.5 3115,2685 3127.5,2697.5 3284.5,2697.5 3298,2711 3298,3233 3389.5,3324.5 3542.86,3324.5 3560,3341.64 v1(3560,3370) 3560,3480 3566.64,3486.64 CON23.8@3566.64,3540 ; v1(4300,3370) 4873.9,3370 4888.9,3355 CON22.20@4888.9,3060.63
  Bottom w5: v1(3560,3370) v1(4300,3370)
LCD_D0: CON3.8 CON23.16 | length 1357.2
  Top w5: CON3.8@3551.67,2380.14 3552,2378 3552,2342.5 3559.5,2335 3620.5,2335 3628,2342.5 3628,2458 3650,2480 3650,3305 3697.5,3352.5 3697.5,3462.5 3724.12,3489.12 CON23.16@3724.12,3540
LCD_D1: CON3.7 CON23.17 | length 1156.6
  Top w5: CON3.7@3551.67,2521.87 3551.67,2924.18 3551.67,3281.67 3597.5,3327.5 3597.5,3428 v1(3617,3447.5) ; v1(3717.5,3447.5) 3717.5,3465 3743.81,3491.31 CON23.17@3743.81,3540
  Bottom w5: v1(3617,3447.5) v1(3717.5,3447.5)
LCD_D2: CON3.10 CON23.18 | length 1469.6
  Top w5: CON3.10@3531.99,2380.14 3532,2332 3539,2325 3650,2325 3709,2384 3709,3086 3662.5,3132.5 3662.5,3302.5 3707.5,3347.5 3707.5,3412.5 3763.49,3468.49 CON23.18@3763.49,3540
LCD_D3: CON3.9 CON23.19 | length 1208.9
  Top w5: CON3.9@3531.99,2521.87 3532,2534 v1(3532,3140) ; v1(3680,3140) 3680,3305 3717.5,3342.5 3717.5,3407.5 3783.18,3473.18 CON23.19@3783.18,3540
  Bottom w5: v1(3532,3140) v1(3680,3140)
LCD_D4: CON3.12 CON23.20 | length 1505.5
  Top w5: CON3.12@3512.3,2380.14 3512,2328 3525,2315 3655,2315 3720,2380 3720,3090 3697.5,3112.5 3697.5,3307.5 3727.5,3337.5 3727.5,3402.32 3727.68,3402.32 3802.86,3477.5 CON23.20@3802.86,3540
LCD_D5: CON3.11 CON23.21 | length 1264.8
  Top w5: CON3.11@3512.3,2521.87 3512.3,2604.8 v1(3512.3,3173.5) ; v1(3714,3173.5) 3714,3309 3737.5,3332.5 3737.5,3397.5 3822.55,3482.55 CON23.21@3822.55,3540
  Bottom w5: v1(3512.3,3173.5) v1(3714,3173.5)
LCD_D6: CON3.14 CON23.22 | length 1541.4
  Top w5: CON3.14@3492.62,2380.14 3492.62,2324.88 3512.5,2305 3660,2305 3730,2375 3730,3310 3747.5,3327.5 3747.5,3392.5 3842.23,3487.23 CON23.22@3842.23,3540
LCD_D7: CON3.13 CON23.23 | length 1330.7
  Top w5: CON3.13@3492.62,2521.87 3492.62,2613.31 3492.62,3269.62 v1(3492.62,3287) ; v1(3765,3287) 3765,3395 3861.92,3491.92 CON23.23@3861.92,3540
  Bottom w5: v1(3492.62,3287) v1(3765,3287)
LCD_D8: CON3.16 CON23.25 | length 1601.3
  Top w5: CON3.16@3472.93,2380.14 3473,2348.58 3473,2327 3505,2295 3665,2295 3740,2370 3740,3235 3901.29,3396.29 CON23.25@3901.29,3540
LCD_D9: CON3.15 CON23.26 | length 1466.2
  Top w5: CON3.15@3472.93,2521.87 v1(3472.93,3206.5) ; v1(3920.97,3206.5) CON23.26@3920.97,3540
  Bottom w5: v1(3472.93,3206.5) v1(3920.97,3206.5)
LCD_D10: CON3.18 CON23.27 | length 1656
  Top w5: CON3.18@3453.25,2380.14 3453.25,2324.25 3492.5,2285 3670,2285 3750,2365 3750,3000 3940.66,3190.66 CON23.27@3940.66,3540
LCD_D11: CON3.17 CON23.28 | length 1525.2
  Top w5: CON3.17@3453.25,2521.87 3453.25,2640.75 v1(3453.25,3222.5) ; v1(3960.34,3222.5) CON23.28@3960.34,3540
  Bottom w5: v1(3453.25,3222.5) v1(3960.34,3222.5)
LCD_D12: CON3.20 CON23.29 | length 1710.7
  Top w5: CON3.20@3433.56,2380.14 3433.56,2321.44 3480,2275 3675,2275 3760,2360 3760,2995 3980.03,3215.03 CON23.29@3980.03,3540
LCD_D13: CON3.19 CON23.30 | length 1584.3
  Top w5: v1(3433.5,3238.5) 3433.5,2534.5 CON3.19@3433.56,2521.87 ; v1(3999.71,3238.5) CON23.30@3999.71,3540
  Bottom w5: v1(3433.5,3238.5) v1(3999.71,3238.5)
LCD_D14: CON3.22 CON23.31 | length 1764
  Top w5: CON3.22@3413.88,2380.14 3413.88,2321.12 3470,2265 3680,2265 3770,2355 3770,2975 4019.4,3224.4 CON23.31@4019.4,3540
LCD_D15: CON3.21 CON23.32 | length 1643.3
  Top w5: CON3.21@3413.88,2521.87 3413.89,2874.99 v1(3413.89,3255) ; v1(4039.1,3255) CON23.32@4039.08,3540
  Bottom w5: v1(3413.89,3255) v1(4039.1,3255)
LCD_D16: CON3.24 CON23.34 | length 1823.9
  Top w5: CON3.24@3394.19,2380.14 3394.19,2323.31 3462.5,2255 3685,2255 3780,2350 3780,2950 4078.45,3248.45 CON23.34@4078.45,3540
LCD_D17: CON3.23 CON23.35 | length 1722.1
  Top w5: CON3.23@3394.19,2521.87 3394.18,2892.5 v1(3394.18,3271) ; v1(4098.1,3271) v1(4098.1,3271) CON23.35@4098.14,3540
  Bottom w5: v1(3394.18,3271) v1(4098.1,3271)
LCD_D18: CON3.26 CON23.36 | length 1875.7
  Top w5: CON3.26@3374.51,2380.14 3374.51,2325.49 3455,2245 3690,2245 3790,2345 3790,2940 4117.82,3267.82 CON23.36@4117.82,3540
LCD_D19: CON3.25 CON23.37 | length 1742.8
  Top w5: CON3.25@3374.51,2521.87 3374.51,3279.51 3398.5,3303.5 3558.5,3303.5 3587.5,3332.5 3587.5,3452.5 v1(3600,3465) ; v1(4137.5,3465) CON23.37@4137.51,3540
  Bottom w5: v1(3600,3465) v1(4137.5,3465)
LCD_D20: CON3.28 CON23.38 | length 1927.5
  Top w5: CON3.28@3354.82,2380.14 3354.82,2327.68 3447.5,2235 3695,2235 3800,2340 3800,2935 4130,3265 4130,3425 4157.19,3452.19 CON23.38@4157.19,3540
LCD_D21: CON3.27 CON23.39 | length 1764.2
  Top w5: CON3.27@3354.82,2521.87 3354.82,2920 v1(3355,3157.5) ; v1(4062.5,3172.5) 4140,3250 4140,3420 4176.88,3456.88 CON23.39@4176.88,3540
  Bottom w5: v1(3355,3157.5) 4047.5,3157.5 v1(4062.5,3172.5)
LCD_D22: CON3.30 CON23.40 | length 1979.3
  Top w5: CON3.30@3335.14,2380.14 3335.14,2329.86 3440,2225 3700,2225 3810,2335 3810,2895 4150,3235 4150,3415 4196.56,3461.56 CON23.40@4196.56,3540
LCD_D23: CON3.29 CON23.41 | length 1809.3
  Top w5: v1(3335,3122.5) 3335.14,2940.14 CON3.29@3335.14,2521.87 ; v1(4105,3165) 4160,3220 4160,3408.75 4216.25,3465 CON23.41@4216.25,3540
  Bottom w5: v1(3335,3122.5) 3687.5,3122.5 3710,3145 4085,3145 v1(4105,3165)
LCD_POWER: C76.2 C77.2 C78.1 C79.1 C80.1 C81.1 C87.1 CON22.30 CON22.31 CON22.32 CON23.1 CON23.2 Q5.S | length 2404.5
  Top w5: C79.1@3344,3365 v2(3375,3365) ; C78.1@4955,2760 C80.1@4955,2890 v2(5000,2890) ; CON22.30@5085.75,3060.63 CON22.31@5105.43,3060.63 CON22.32@5125.12,3060.63
  Top w25: Q5.S@3246,3290.5 3290.5,3290.5 3344,3344 C79.1@3344,3365
  Bottom w30: v2(3375,3365) 3410,3330 4895,3330 5000,3225 v2(5000,2890)
  other v2: 5000,2920 3375,3395
LCD_PWR: CON3.40 R124.1 | length 842.7
  Top w5: R124.1@3090,3105 3090,3070 3105,3055 3105,2467.5 3130,2442.5 3227.5,2442.5 3236.71,2433.29 CON3.40@3236.71,2380.14
LCD_RST: CON3.33 CON22.1 CON23.10 | length 2439.6
  Top w5: CON3.33@3295.77,2521.87 3295.77,2577.5 3317.5,2599.23 v1(3317.5,3062.5) 3317.5,3237.5 3394.5,3314.5 3554.5,3314.5 3577.5,3337.5 3577.5,3467.5 3606.01,3496.01 CON23.10@3606.01,3540 ; v1(4300,3062.5) 4514.88,3062.5 CON22.1@4514.88,3060.63
  Bottom w5: v1(3317.5,3062.5) v1(4300,3062.5)
LED0_LINK: CON16.14 R50.1 R58.1 | length 1954.4
  Top w10: R58.1@1745,4881 R50.1@1804.92,4881 1833.92,4910 1890,4910 1925,4875 2625,4875 2795,5045 2795,5355 2820,5380 3020,5380 3065,5425 3175,5425 3183.43,5433.43 CON16.14@3183.43,5510
LED1_LINK: CON21.14 R76.1 R81.1 | length 953.4
  Top w10: CON21.14@4584.69,5511.03 4584.69,5460 4594.69,5450 4620,5450 4730,5340 5092.5,5340 5105,5327.5 5105,5145 5120,5130 R81.1@5193.5,5130 R76.1@5193.5,5080
LED_CON: CON3.36 CON29.3 | length 3126.1
  Top w5: CON29.3@2155,290 2105,340 2105,410 2192.5,497.5 2192.5,752.5 v1(2225,785) ; v1(2225,1055) 2735,1055 2805,1125 2805,2230 v1(2827.5,2252.5) ; v1(3040,2270) 3240,2270 3276.08,2306.08 CON3.36@3276.08,2380.14
  Bottom w5: v1(2225,785) v1(2225,1055) ; v1(2827.5,2252.5) 2845,2270 v1(3040,2270)
LED_STATE: CON3.46 R86.2 | length 4306.1
  Top w5: v1(1605,2335) 1575,2365 1575,2380 1575,4794 1600,4819 R86.2@1745,4819 ; v1(3060,2305) 3167.5,2305 3177.66,2315 CON3.46@3177.66,2380.14
  Bottom w5: v1(1605,2335) 1635,2305 v1(3060,2305)
MIPI_DSI_TXDN0: CON1.8 CON22.3 | length 1981.9
  Top w5: CON1.8@4191.63,1513.8 4152.7,1513.8 4148,1518.5 4091.5,1518.5 3920,1690 3920,2205 4559,2844 4559,3027.5 4555,3031.5 4555,3059.88 CON22.3@4554.25,3060.63
MIPI_DSI_TXDN1: CON1.14 CON22.6 | length 1916.5
  Top w5: CON1.14@4191.63,1572.85 4155.5,1572.85 4150.85,1577.5 4087.5,1577.5 3960,1705 3960,2190 4618,2848 4618,3027 4615,3030 4615,3058.94 CON22.6@4613.31,3060.63
MIPI_DSI_TXDN2: CON1.20 CON22.9 | length 1851.1
  Top w5: CON1.20@4191.63,1631.91 4155.5,1631.91 4150.91,1636.5 4083.5,1636.5 4000,1720 4000,2175 4677,2852 4677,3025.5 4672.36,3030.14 CON22.9@4672.36,3060.63
MIPI_DSI_TXDN3: CON1.26 CON22.12 | length 1782.8
  Top w5: CON1.26@4191.63,1690.96 4157.5,1690.96 4152.46,1696 4084,1696 4040,1740 4040,2160 4736,2856 4736,3025 4731.42,3029.58 CON22.12@4731.42,3060.63
MIPI_DSI_TXDN4: CON1.32 CON22.15 | length 1702.7
  Top w5: CON1.32@4191.63,1750.02 4155,1750.02 4150.02,1755 4105,1755 4080,1780 4080,2145 4795,2860 4795,3020 4790.47,3024.53 CON22.15@4790.47,3060.63
MIPI_DSI_TXDP0: CON1.10 CON22.4 | length 1965
  Top w5: CON1.10@4191.63,1533.48 4154,1533.48 4149.02,1528.5 4096.5,1528.5 3930,1695 3930,2200 4569,2839 4569,3026.5 4573.94,3031.44 CON22.4@4573.94,3060.63
MIPI_DSI_TXDP1: CON1.16 CON22.7 | length 1899.7
  Top w5: CON1.16@4191.63,1592.54 4154,1592.54 4148.96,1587.5 4092.5,1587.5 3970,1710 3970,2185 4628,2843 4628,3026.51 4632.99,3031.5 CON22.7@4632.99,3060.63
MIPI_DSI_TXDP2: CON1.22 CON22.10 | length 1834.4
  Top w5: CON1.22@4191.63,1651.59 4155.5,1651.59 4150.41,1646.5 4088.5,1646.5 4010,1725 4010,2170 4687,2847 4687,3025.45 4692.05,3030.5 CON22.10@4692.05,3060.63
MIPI_DSI_TXDP3: CON1.28 CON22.13 | length 1765.7
  Top w5: CON1.28@4191.63,1710.65 4190.98,1710 4157.5,1710 4153.5,1706 4089,1706 4050,1745 4050,2155 4746,2851 4746,3024.9 4751.1,3030 CON22.13@4751.1,3060.63
MIPI_DSI_TXDP4: CON1.34 CON22.16 | length 1685.8
  Top w5: CON1.34@4191.63,1769.7 4155,1769.7 4150.3,1765 4110,1765 4090,1785 4090,2140 4805,2855 4805,3020 4810.16,3025.16 CON22.16@4810.16,3060.63
NETC1_2: C1.2 C2.1 C4.1 F1.1 SW1.2 SW1.3 SW1.5 SW1.6 | length 807.6
  Top w5: C2.1@6515,1560 C1.2@6515,1660 C4.1@6515,1709 F1.1@6515,1769.5
  Top w50: SW1.6@6711.57,1457.64 SW1.5@6711.57,1560 ; SW1.3@6908.43,1457.64 SW1.2@6908.43,1560
  Top w60: C2.1@6515,1560 SW1.5@6711.57,1560
  Bottom w50: SW1.6@6711.57,1457.64 SW1.3@6908.43,1457.64
NETC6_2: C6.2 R2.1 R3.2 U1.5 | length 183.1
  Top w5: R3.2@2934,1520 C6.2@2934,1570 R2.1@2934,1620 2956.97,1620 2980,1596.97 U1.5@3007.6,1596.97
NETC8_2: C8.2 R1.1 U1.1 | length 407.1
  Top w5: R1.1@2876,1670 2901,1645 2960,1645 2975,1630 3030,1630 3040,1620 3040,1575 3007.6,1542.6 U1.1@3007.6,1495 2985,1495 2960,1470 C8.2@2934,1470
NETC9_1: C9.1 FB1.2 U1.4 | length 133
  Top w25: U1.4@3082.4,1596.97 FB1.2@3082.4,1670 C9.1@3082.4,1730
NETC12_2: C12.2 R6.1 R7.2 U2.5 | length 173.1
  Top w5: R7.2@3249,1520 C12.2@3249,1570 R6.1@3249,1620 3270,1620 3293.03,1596.97 U2.5@3312.6,1596.97
NETC14_2: C14.2 R5.1 U2.1 | length 380
  Top w5: R5.1@3191,1670 3216,1645 3270,1645 3285,1630 3330,1630 3340,1620 3340,1580 3312.6,1552.6 U2.1@3312.6,1495 3274,1495 C14.2@3249,1470
NETC15_1: C15.1 FB2.2 U2.4 | length 134.3
  Top w5: U2.4@3387.4,1596.97 3387.4,1669.4 FB2.2@3388,1670 C15.1@3388,1731
NETC16_1: C16.1 CON6.1 E2.1 Q2.S | length 587.6
  Top w5: Q2.S@6278.5,4972.5 C16.1@6515,4972.5 6681.5,4972.5 6689,4980 E2.1@6689,5015 6711.18,5015 6755,5058.82 CON6.1@6809.84,5058.82
NETC19_2: C19.2 R9.1 R11.2 U3.5 | length 169.2
  Top w5: U3.5@5861.97,4409.3 5861.97,4438.03 5850,4450 R9.1@5850,4473.5 C19.2@5900,4473.5 R11.2@5950,4473.5
NETC21_2: C21.2 R8.1 R10.1 U3.1 | length 377.4
  Top w5: R10.1@5720,4473.5 C21.2@5770,4473.5 ; U3.1@5760,4409.3 5760,4440 5770,4450 C21.2@5770,4473.5 ; R8.1@6005,4531.5 5976,4502.5 5832.5,4502.5 5803.5,4473.5 C21.2@5770,4473.5
NETC22_1: C22.1 FB4.2 U3.4 | length 143
  Top w25: U3.4@5861.97,4334.5 C22.1@5935,4334.5 FB4.2@6005,4334.5
NETC25_2: C25.2 R12.1 U4.3 | length 141.6
  Top w5: R12.1@4280,747 C25.2@4280,694 4327.6,694 4332.6,699 U4.3@4332.6,732.97
NETC26_1: C26.1 FB5.2 U4.1 | length 124
  Top w5: U4.1@4407.4,732.97 4414.43,740 C26.1@4463.5,740 FB5.2@4463.5,805
NETC34_1: C34.1 Q3.G R23.1 R27.1 | length 313.7
  Top w5: Q3.G@1297,969.5 1297,941 1306,932 R23.1@1306,905 1306,844 1335,815 C34.1@1426,815 R27.1@1426,762.5
NETC35_1: C35.1 CON9.5 E8.1 R16.1 R24.2 | length 941.1
  Top w5: R16.1@977.5,998.5 C35.1@922.5,998.5 950,971 950,908.5 E8.1@922.5,881 922.5,860.79 938.29,845 CON9.5@938.29,803.07 940,801.36 940,675 1052.5,562.5 R24.2@1426,562.5
NETC36_2: C36.2 CON10.1 E14.1 FB9.2 | length 754.3
  Top w15: CON10.1@576.18,5419.84 576.18,5373.82 625,5325 E14.1@625,5309 C36.2@680,5309 831,5309 872.5,5267.5 FB9.2@872.5,4909
NETC46_1: C46.1 U6.37 | length 153.9
  Top w5: U6.37@1065.77,4747.17 1065.77,4795 1075.77,4805 1117.5,4805 1127.5,4815 C46.1@1127.5,4851
NETC47_1: C47.1 R30.1 R31.1 U7.1 | length 366.9
  Top w5: R30.1@3289,2115 3315,2089 3315,1990 3323.39,1981.61 U7.1@3361.61,1981.61 3403.39,1981.61 3415,1970 3415,1941 C47.1@3446,1910 R31.1@3446,1860
NETC48_1: C48.1 U7.2 | length 103.9
  Top w5: U7.2@3361.61,2007.2 3398.8,2007.2 C48.1@3446,1960
NETC50_1: C50.1 R29.1 U6.34 | length 133.1
  Top w10: U6.34@1134.67,4638.9 1213.4,4638.9 R29.1@1216.5,4642 C50.1@1216.5,4692
NETC51_1: C51.1 U6.1 Y1.3 | length 304.1
  Top w5: Y1.3@629.74,4855.43 681.07,4855.43 C51.1@687.5,4849 708.5,4849 737.5,4820 737.5,4683.27 742.5,4678.27 U6.1@780.33,4678.27
NETC52_2: C52.2 R36.2 | length 52
  Top w5: R36.2@3504,2010 C52.2@3556,2010
NETC53_2: C53.2 R37.2 | length 52
  Top w5: R37.2@3504,2060 C53.2@3556,2060
NETC54_1: C54.1 U6.2 Y1.1 | length 474.6
  Top w5: C54.1@472.5,4791 Y1.1@535.26,4784.57 570.69,4820 717.5,4820 722.5,4815 722.5,4670 733.92,4658.58 U6.2@780.33,4658.58
NETC58_1: C58.1 C59.1 CON12.1 CON12.2 CON12.3 CON12.4 FB15.2 | length 124.3
  Top w5: C58.1@2744,4105 FB15.2@2744,4170 C59.1@2744,4229.29
NETC60_1: C60.1 C61.1 CON13.1 CON13.2 CON13.3 CON13.4 FB16.2 | length 134.7
  Top w5: CON13.4@5652,3008.66 CON13.2@5652,3028.35 ; C60.1@5801,3010 C61.1@5801,3060 FB16.2@5801,3125
NETC62_1: C62.1 C63.1 CON12.37 CON12.38 CON12.39 CON12.40 FB18.2 | length 416
  Top w5: CON12.37@3295.63,4087.55 CON12.39@3315.32,4087.55 ; CON12.38@3295.63,4229.29 CON12.40@3315.32,4229.29 ; 3315.31,4045 3320.31,4040 3468,4040 3479,4051 C62.1@3507,4051 FB18.2@3507,4115 C63.1@3507,4229.29
NETC64_1: C64.1 C65.1 CON13.37 CON13.38 CON13.39 CON13.40 FB19.2
NETC66_1: C66.1 R66.1 R67.1 | length 135.8
  Top w10: R67.1@2554,5165 R66.1@2554,5215 2554,5246.32 C66.1@2592.5,5284.82
NETC68_1: C68.1 C69.1 CON17.1 CON17.2 CON17.3 CON17.4 FB20.2 | length 384.2
  Top w5: C68.1@4149,4230.31 FB20.2@4149,4170 C69.1@4149,4105 4149,4050 4164,4035 4332.56,4035 4342.56,4045
NETC70_1: C70.1 C71.1 CON20.2 CON20.4 CON20.6 FB22.2